# EAGLE board Z380X1A (EAGLE 3.51)

Size 101.6 x 81.28 mm. Coordinates in mm from the lower left corner, seen from the top.
Outline: 0,0 0,81.28 101.6,81.28 101.6,0 0,0
Copper layers used: 
tRestrict: area 55.6,32 to 74.4,56.7

## Footprints (pad centres in the part's own frame; a part is rotated, then mirrored left to right if it is on the bottom)
25M/90 = drill 1.016 pad 1.575 octagon:  16.764,-1.27;  13.97,-1.27;  11.176,-1.27;  8.382,-1.27;  5.588,-1.27;  2.794,-1.27;  0,-1.27;  -2.794,-1.27;  -5.588,-1.27;  -8.382,-1.27;  -11.176,-1.27;  -13.97,-1.27;  -16.764,-1.27;  15.367,1.27;  12.573,1.27;  9.779,1.27;  6.985,1.27;  4.191,1.27;  1.397,1.27;  -1.397,1.27;  -4.191,1.27;  -6.985,1.27;  -9.779,1.27;  -12.573,1.27;  -15.367,1.27 | hole 3.2: 23.622,0; -23.622,0
L-14 = drill 0.813 pad 1.397 octagon:  -7.62,-3.81;  -5.08,-3.81;  7.62,-3.81;  7.62,3.81;  -2.54,-3.81;  0,-3.81;  5.08,-3.81;  2.54,-3.81;  5.08,3.81;  2.54,3.81;  0,3.81;  -2.54,3.81;  -5.08,3.81;  -7.62,3.81
AG-2 = drill 0.813 pad 1.397 square:  -5.08,5.08;  5.08,-5.08
P-100X = drill 0.813 pad 1.397 long:  -18.2,13.812;  -16.25,12.838;  -18.2,11.863;  -16.25,10.887;  -18.2,9.912;  -16.25,8.938;  -18.2,7.963;  -16.25,6.987;  -18.2,6.013;  -16.25,5.037;  -18.2,4.062;  -16.25,3.087;  -18.2,2.112;  -16.25,1.137;  -18.2,0.163;  -16.25,-0.812;  -18.2,-1.788;  -16.25,-2.763;  -18.2,-3.737;  -16.25,-4.713;  -18.2,-5.688;  -16.25,-6.662;  -18.2,-7.638;  -16.25,-8.613;  -18.2,-9.588;  -16.25,-10.562;  -18.2,-11.537;  -16.25,-12.512;  -18.2,-13.488;  -16.25,-14.463;  18.2,-14.463;  16.25,-13.488;  18.2,-12.512;  16.25,-11.537;  18.2,-10.562;  16.25,-9.588;  18.2,-8.613;  16.25,-7.638;  18.2,-6.662;  16.25,-5.688;  18.2,-4.713;  16.25,-3.737;  18.2,-2.763;  16.25,-1.788;  18.2,-0.812;  16.25,0.163;  18.2,1.137;  16.25,2.112;  18.2,3.087;  16.25,4.062;  18.2,5.037;  16.25,6.013;  18.2,6.987;  16.25,7.963;  18.2,8.938;  16.25,9.912;  18.2,10.887;  16.25,11.863;  18.2,12.838;  16.25,13.812 | drill 0.813 pad 1.397 offset:  -9.262,-20.8;  -8.287,-18.85;  -7.312,-20.8;  -6.338,-18.85;  -5.362,-20.8;  -4.388,-18.85;  -3.413,-20.8;  -2.438,-18.85;  -1.462,-20.8;  -0.487,-18.85;  0.487,-20.8;  1.462,-18.85;  2.438,-20.8;  3.413,-18.85;  4.388,-20.8;  5.362,-18.85;  6.338,-20.8;  7.312,-18.85;  8.287,-20.8;  9.262,-18.85;  9.262,20.8;  8.287,18.85;  7.312,20.8;  6.338,18.85;  5.362,20.8;  4.388,18.85;  3.413,20.8;  2.438,18.85;  1.462,20.8;  0.487,18.85;  -0.487,20.8;  -1.462,18.85;  -2.438,20.8;  -3.413,18.85;  -4.388,20.8;  -5.362,18.85;  -6.338,20.8;  -7.312,18.85;  -8.287,20.8;  -9.262,18.85 | smd 2.2 x 0.35 rotated 4.3:  -8.1,9.1;  -8.1,8.45;  -8.1,7.8;  -8.1,7.15;  -8.1,6.5;  -8.1,5.85;  -8.1,5.2;  -8.1,4.55;  -8.1,3.9 | smd 2.2 x 0.35 rotated 26.8:  -8.1,3.25;  -8.1,2.6;  -8.1,1.95;  -8.1,1.3;  -8.1,0.65;  -8.1,0;  -8.1,-0.65;  -8.1,-1.3;  -8.1,-1.95;  -8.1,-2.6 | smd 2.2 x 0.35 rotated 49.3:  -8.1,-3.25;  -8.1,-3.9;  -8.1,-4.55;  -8.1,-5.2;  -8.1,-5.85;  -8.1,-6.5;  -8.1,-7.15;  -8.1,-7.8;  -8.1,-8.45;  -8.1,-9.1 | smd 2.2 x 0.35 rotated 71.8:  -8.1,-9.75;  8.1,-9.75;  8.1,-9.1;  8.1,-8.45;  8.1,-7.8;  8.1,-7.15;  8.1,-6.5;  8.1,-5.85;  8.1,-5.2;  8.1,-4.55 | smd 2.2 x 0.35 rotated 94.3:  8.1,-3.9;  8.1,-3.25;  8.1,-2.6;  8.1,-1.95;  8.1,-1.3;  8.1,-0.65;  8.1,0;  8.1,0.65;  8.1,1.3;  8.1,1.95 | smd 2.2 x 0.35 rotated 116.8:  8.1,2.6;  8.1,3.25;  8.1,3.9;  8.1,4.55;  8.1,5.2;  8.1,5.85;  8.1,6.5;  8.1,7.15;  8.1,7.8;  8.1,8.45 | smd 2.2 x 0.35 rotated 139.3:  8.1,9.1 | smd 0.35 x 2.2 rotated 139.3:  6.175,-11.425;  5.525,-11.425;  4.875,-11.425;  4.225,-11.425;  3.575,-11.425;  2.925,-11.425;  2.275,-11.425;  1.625,-11.425;  0.975,-11.425 | smd 0.35 x 2.2 rotated 161.8:  0.325,-11.425;  -0.325,-11.425;  -0.975,-11.425;  -1.625,-11.425;  -2.275,-11.425;  -2.925,-11.425;  -3.575,-11.425;  -4.225,-11.425;  -4.875,-11.425;  -5.525,-11.425 | smd 0.35 x 2.2 rotated 184.3:  -6.175,-11.425;  -6.175,10.775;  -5.525,10.775;  -4.875,10.775;  -4.225,10.775;  -3.575,10.775;  -2.925,10.775;  -2.275,10.775;  -1.625,10.775;  -0.975,10.775 | smd 0.35 x 2.2 rotated 206.8:  -0.325,10.775;  0.325,10.775;  0.975,10.775;  1.625,10.775;  2.275,10.775;  2.925,10.775;  3.575,10.775;  4.225,10.775;  4.875,10.775;  5.525,10.775 | smd 0.35 x 2.2 rotated 4.4:  6.175,10.775
L20 = drill 0.813 pad 1.397 square:  0,0;  2.54,0;  5.08,0;  7.62,0;  10.16,0;  12.7,0;  15.24,0;  17.78,0;  20.32,0;  22.86,0;  22.86,7.62;  20.32,7.62;  17.78,7.62;  15.24,7.62;  12.7,7.62;  10.16,7.62;  7.62,7.62;  5.08,7.62;  2.54,7.62;  0,7.62
L16 = drill 0.813 pad 1.397 square:  0,0;  2.54,0;  5.08,0;  7.62,0;  10.16,0;  12.7,0;  15.24,0;  17.78,0;  17.78,7.62;  15.24,7.62;  12.7,7.62;  10.16,7.62;  7.62,7.62;  5.08,7.62;  2.54,7.62;  0,7.62
L-20 = drill 0.813 pad 1.397 octagon:  -11.43,-3.81;  -8.89,-3.81;  3.81,-3.81;  6.35,-3.81;  -6.35,-3.81;  -3.81,-3.81;  1.27,-3.81;  -1.27,-3.81;  8.89,-3.81;  11.43,-3.81;  11.43,3.81;  8.89,3.81;  6.35,3.81;  3.81,3.81;  1.27,3.81;  -1.27,3.81;  -3.81,3.81;  -6.35,3.81;  -8.89,3.81;  -11.43,3.81
L-28 = drill 0.813 pad 1.397 square:  -16.51,-3.81 | drill 0.813 pad 1.397 round:  -13.97,-3.81;  -11.43,-3.81;  -8.89,-3.81;  -6.35,-3.81;  -3.81,-3.81;  -1.27,-3.81;  1.27,-3.81;  3.81,-3.81;  6.35,-3.81;  8.89,-3.81;  11.43,-3.81;  13.97,-3.81;  16.51,-3.81;  16.51,3.81;  13.97,3.81;  11.43,3.81;  8.89,3.81;  6.35,3.81;  3.81,3.81;  1.27,3.81;  -1.27,3.81;  -3.81,3.81;  -6.35,3.81;  -8.89,3.81;  -11.43,3.81;  -13.97,3.81;  -16.51,3.81
L14-4 = drill 0.813 pad 1.397 square:  -7.62,-3.81 | drill 0.813 pad 1.397 round:  7.62,-3.81;  7.62,3.81;  -7.62,3.81

## Placement (x,y rotation side)
C1  4.7æF  [10]  64.99,-11.14 0 top
CON1  DB25M/90  [25M/90]  63.05,76.43 0 top
IC1  74HC393A  [L-14]  92.71,58.42 270 top
R1  10K  [10]  68.8,-18.76 0 top
R2  1500E  [10]  68.8,-26.38 0 top
R3  10K  [10]  48.48,-13.68 0 top
S1  RESET  [AG-2]  82.77,-21.3 0 top  (outside the outline)
U1  Z380X  [P-100X]  65,44.68 0 top
U2  MAX233  [L20]  8.23,63.71 0 top
U3  74LS74  [L-14]  12.83,28.11 90 top
U4  74LS04  [L-14]  92.71,35.56 270 top
U5  74F257A  [L16]  22.86,17.78 0 top
U6  74F257A  [L16]  68.4,11.34 180 top
U7  74F257A  [L16]  39.32,37.12 180 top
U8  MCM414256P  [L-20]  21.59,55.88 0 top
U9  MCM414256P  [L-20]  21.59,45.72 0 top
U10  U380-1  [L-28]  24.99,7.68 0 top
U11  U380-2  [L-28]  19.05,-34.29 0 top  (outside the outline)
X1  19.6608  [L14-4]  88.22,7.51 0 top

## Library data of the parts
C1 R1-R3 = DISCRETE
CON1 = CONNECT
IC1 U3 U4 = 74XX
S1 U2 U5-U7 X1 = OTHER
U1 = ZILOG
U8 U9 = DRAM
U10 U11 = ICT

## Nets
+5V: U2.
A0: U1. U5.
A1: U1. U5.
A2: U1. U5.
A3: U1. U5.
A4: U1. U5.
A5: U1. U5.
A6: U1. U5.
A7: U1. U5.
A8: U1. U6.
A9: U1. U6.
A10: U1. U6.
A11: U1. U6.
A12: U1. U6.
A13: U1. U6.
A14: U1. U6.
A15: U1. U6.
A16: U1. U7.
A17: U1. U7.
A18: U1. U7.
A19: U1. U7.
CLK4: IC1. U1.
CLK16: IC1.
CLRD: IC1. R3. U4.
D0: U1. U9.
D1: U1. U9.
D2: U1. U9.
D3: U1. U9.
D4: U1. U8.
D5: U1. U8.
D6: U1. U8.
D7: U1. U8.
DSR: CON1. U2.
DTR: CON1. U2.
GND: IC1. U2. U3. U4. U5. U6. U7. U8. U9. U10. U11. X1.
GNDA: C1. CON1. R2. U3.
LMCS: U1. U8. U9.
MA0: U5. U8. U9.
MA1: U5. U8. U9.
MA2: U5. U8. U9.
MA3: U5. U8. U9.
MA4: U6. U8. U9.
MA5: U6. U8. U9.
MA6: U6. U8. U9.
MA7: U6. U8. U9.
MA8: U7. U8. U9.
MA9: U7. U8. U9.
MCS0: U1.
N$1: U3. U4.
N$2: U2.
N$3: R2. S1.
N$4: C1. R1. S1. U4.
N$5: U2.
N$6: U2.
RES*: U1. U3.
RESCLK: IC1. U3.
RXD: CON1. U2.
TREFA: U1. U5. U6. U7.
TREFC: U1. U8. U9.
TREFR: U1. U8. U9.
TXD: CON1. U2.
VCC: IC1. R1. R3. U3. U4. U5. U6. U7. U8. U9. U10. U11. X1.
VDD: U1.
VOUT: IC1. X1.
VSS: U1.

## Tracks (layer width: path | path; a pad name or v marks a point on that pad's centre or on a via)
A0  (1 unrouted)
A1  (1 unrouted)
A2  (1 unrouted)
A3  (1 unrouted)
A4  (1 unrouted)
A5  (1 unrouted)
A6  (1 unrouted)
A7  (1 unrouted)
A8  (1 unrouted)
A9  (1 unrouted)
A10  (1 unrouted)
A11  (1 unrouted)
A12  (1 unrouted)
A13  (1 unrouted)
A14  (1 unrouted)
A15  (1 unrouted)
A16  (1 unrouted)
A17  (1 unrouted)
A18  (1 unrouted)
A19  (1 unrouted)
CLK4  (1 unrouted)
CLK16  (1 unrouted)
CLRD  (4 unrouted)
D0  (1 unrouted)
D1  (1 unrouted)
D2  (1 unrouted)
D3  (1 unrouted)
D4  (1 unrouted)
D5  (1 unrouted)
D6  (1 unrouted)
D7  (1 unrouted)
DSR  (1 unrouted)
DTR  (1 unrouted)
GND  (12 unrouted)
GNDA  (3 unrouted)
LMCS  (2 unrouted)
MA0  (2 unrouted)
MA1  (2 unrouted)
MA2  (2 unrouted)
MA3  (2 unrouted)
MA4  (2 unrouted)
MA5  (2 unrouted)
MA6  (2 unrouted)
MA7  (2 unrouted)
MA8  (2 unrouted)
MA9  (2 unrouted)
N$1  (1 unrouted)
N$2  (1 unrouted)
N$3  (1 unrouted)
N$4  (3 unrouted)
N$5  (1 unrouted)
N$6  (1 unrouted)
RES*  (1 unrouted)
RESCLK  (1 unrouted)
RXD  (1 unrouted)
TREFA  (3 unrouted)
TREFC  (2 unrouted)
TREFR  (2 unrouted)
TXD  (1 unrouted)
VCC  (13 unrouted)
VDD  (7 unrouted)
VOUT  (1 unrouted)
VSS  (7 unrouted)

## Text on the board
Document: 0.1625